# Altium PCB CabinTempSenseHardware2.PcbDoc
Units mil, origin at the board's own origin, x right, y up, seen from the top; angles counter-clockwise.
Board outline 1562 x 1352 mil, 2 copper layers (Top Layer, Bottom Layer); 25 components, 18 nets, 127 pads, 76 vias.
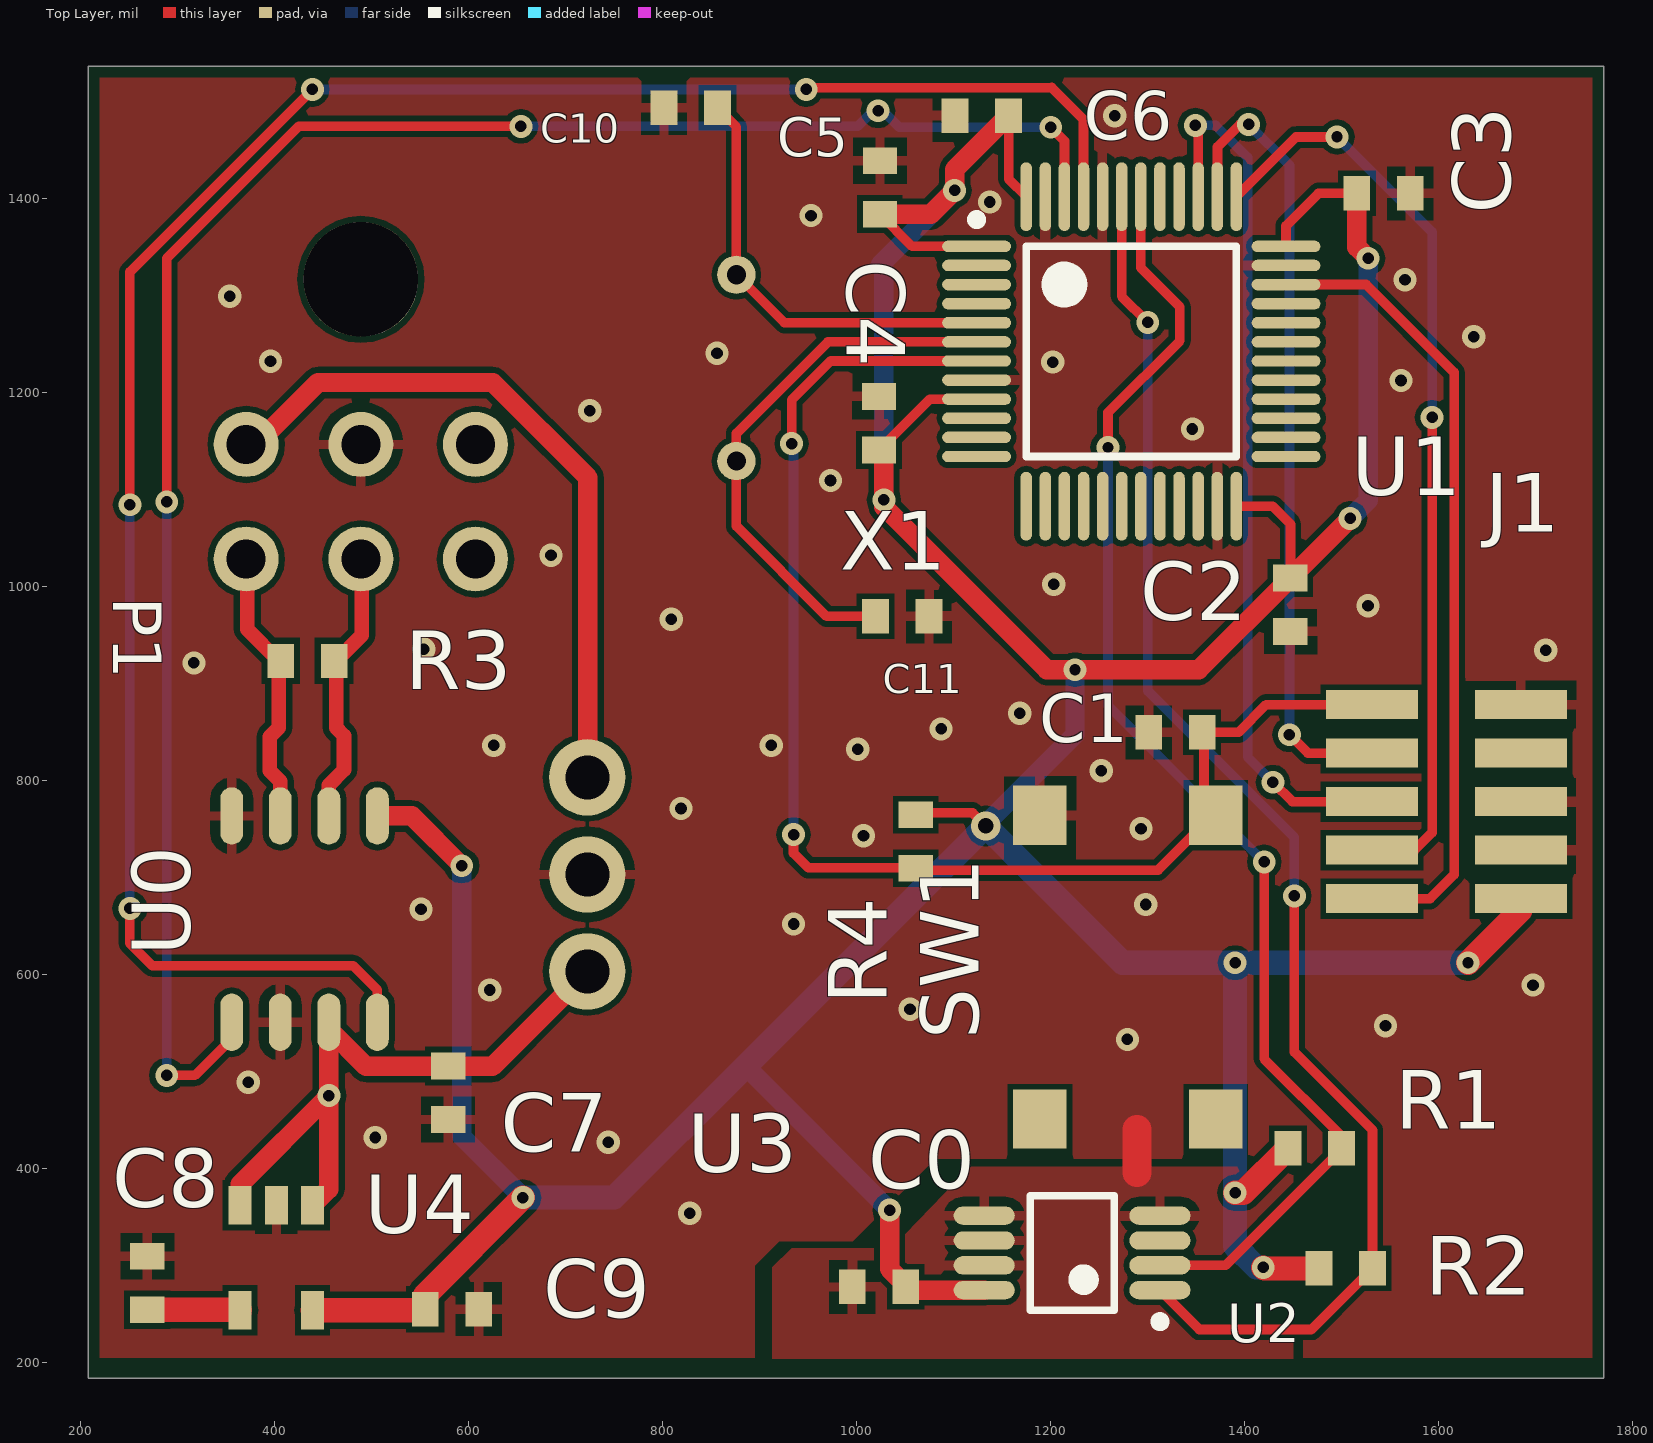
[diagram p0: Top Layer view]
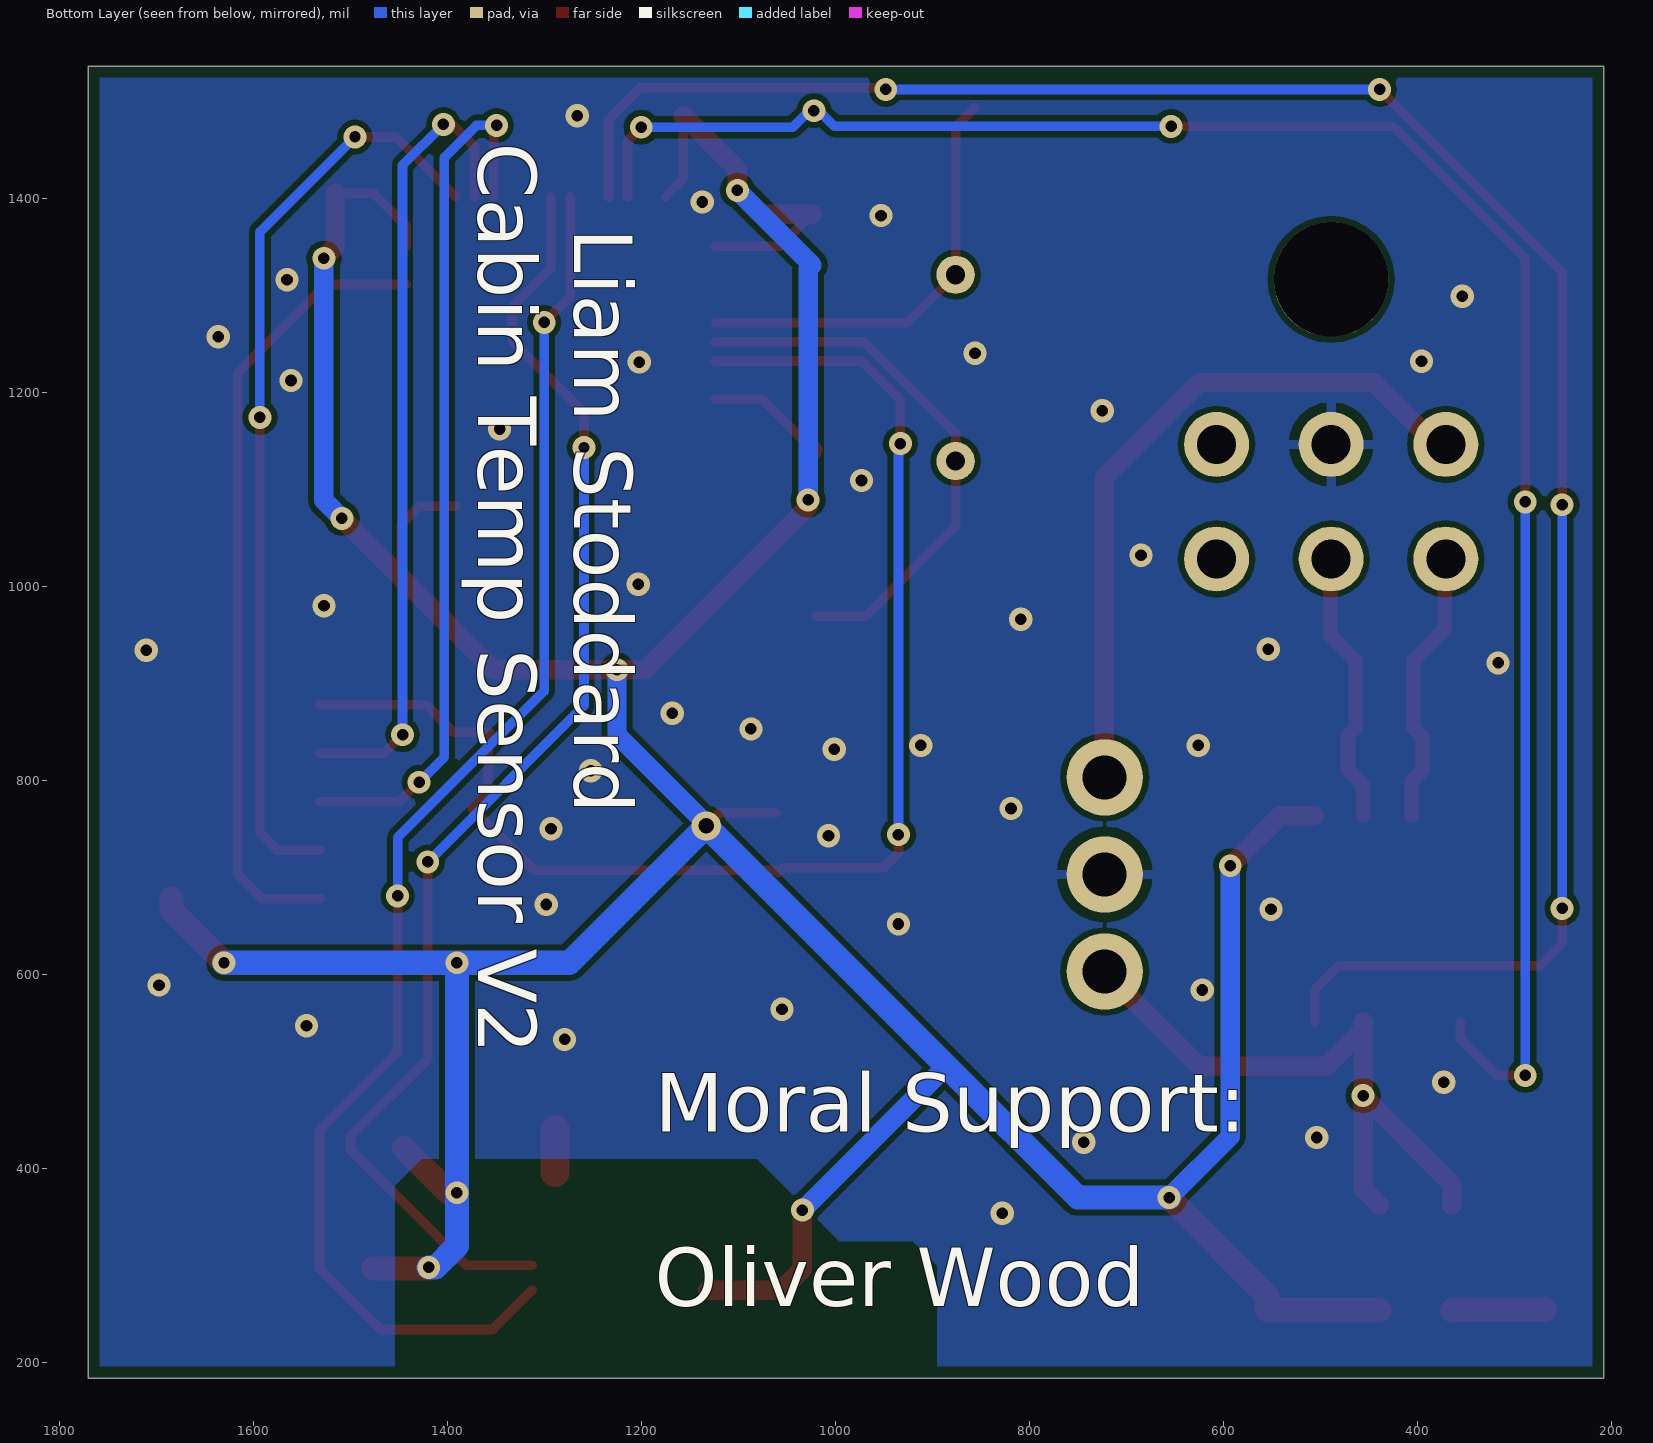
[diagram p1: Bottom Layer view, seen from below]
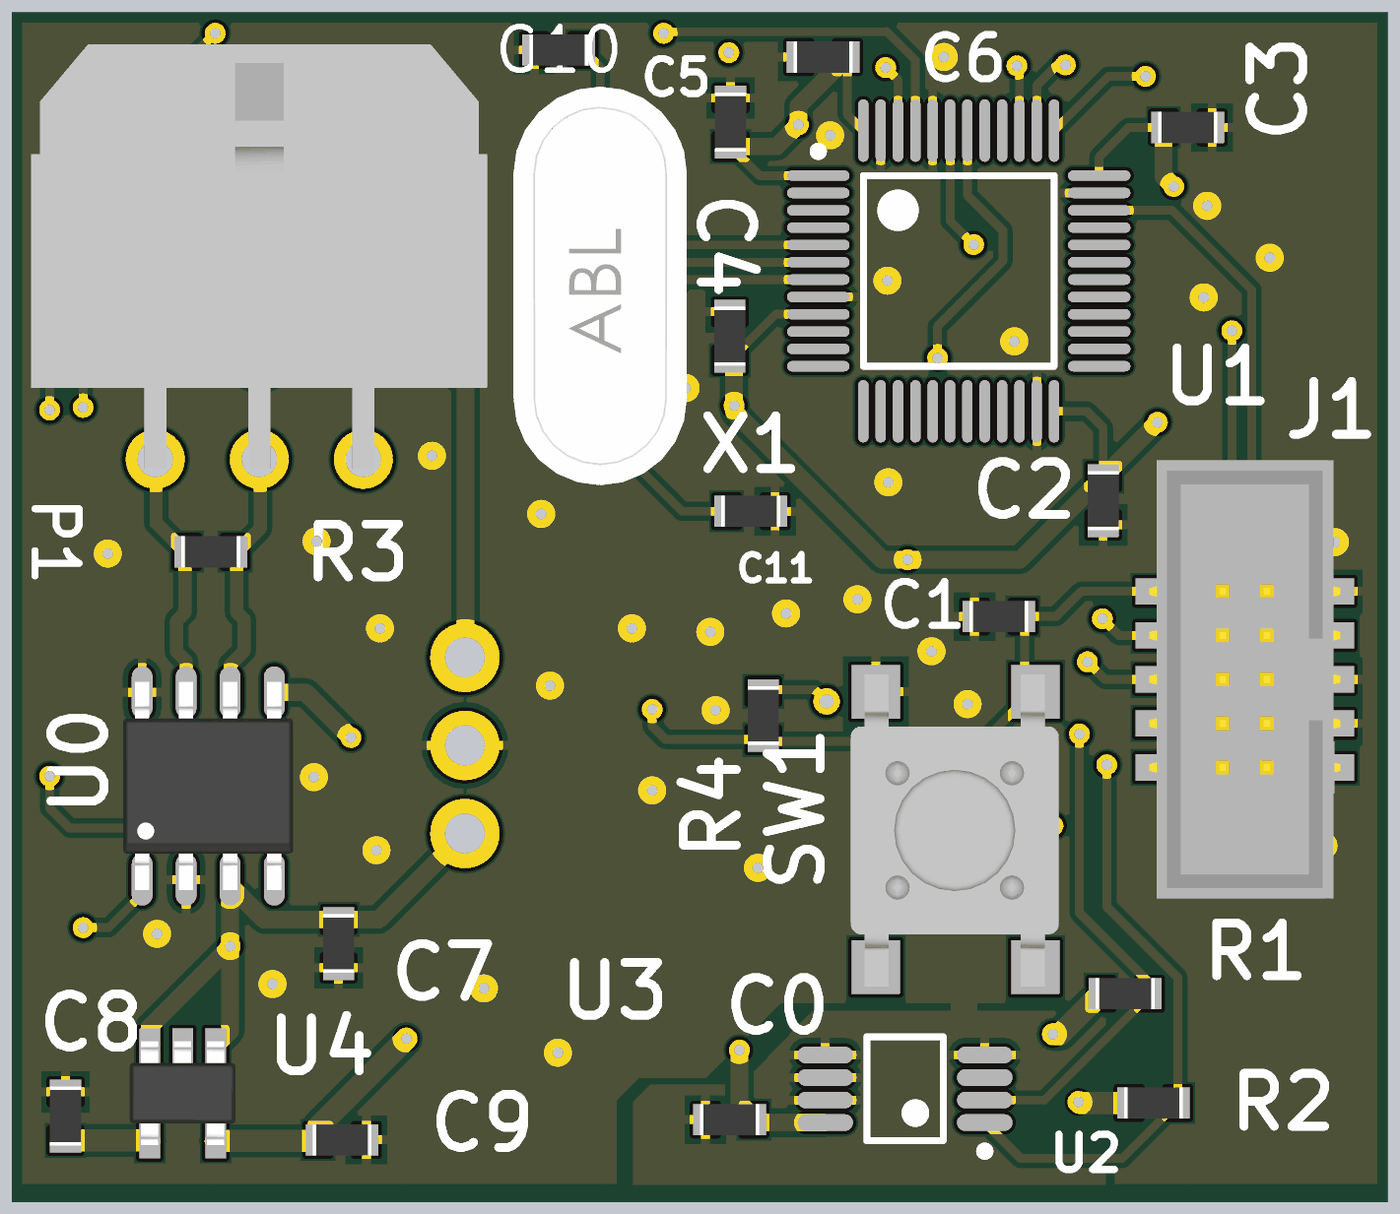
[diagram p2: 3D render of the assembled board from above, using the file's embedded part models]

## Layer stack, top to bottom
Top Solder: solder mask 0.4, Solder Resist, Dk 3.5
Top Layer: signal copper 1.4
Dielectric 1: dielectric 12.6, FR-4, Dk 4.8
Bottom Layer: signal copper 1.4
Bottom Solder: solder mask 0.4, Solder Resist, Dk 3.5

## Board outline
208,184 208,1536 489,1536 675,1536 863,1536 1770,1536 1770,858 1770,184

## Design rules (kind name [scope] priority, off if disabled: settings)
BoardOutlineClearance [All] p1: gap=11.81
Clearance [All] p1: gap=6
ComponentClearance [All] p1: gap=3.94 collisioncheckmode=3 verticalgap=10 showdistances=FALSE
DiffPairsRouting [All] p1: maxlimit=10 minlimit=10 mostfreqgap=10 toplayer_minwidth=15 toplayer_maxwidth=15 toplayer_prefwidth=15 bottomlayer_minwidth=15 bottomlayer_maxwidth=15 bottomlayer_prefwidth=15 maxuncoupledlength=500
FabricationTestPointUsage TestPointUsage [All] p1: valid=0 allowmultiple=FALSE
FabricationTestpoint Testpoint [All] p1: side=3 testpointundercomponent=TRUE minsize=40 maxsize=100 preferedsize=60 minholesize=0 maxholesize=40 preferedholesize=32 testpointgrid=1 allowsidetop=TRUE allowsidebottom=TRUE usegrid=TRUE gridtolerance=0.01
HoleSize [All] p1: absolutevalues=TRUE maxlimit=248.03 minlimit=11.81 maxpercent=80.000 minpercent=20.000
HoleToHoleClearance [All] p1: gap=17.72 allowstackedmicrovias=TRUE
MinimumAnnularRing [All] p1: minimumring=5.91
MinimumSolderMaskSliver [All] p1: minsoldermaskwidth=2.95
PlaneClearance [All] p1: clearance=19.68
PlaneConnect [All] p1: planeconnectstyle=Direct reliefexpansion=20 reliefentries=4 reliefconductorwidth=10 reliefairgap=10
PolygonConnect "GND Via" [isVia AND InNet('GND')] p1: connectstyle=Direct reliefconductorwidth=10 reliefentries=4 polygonreliefangle="90 Angle" airgapwidth=10 // GND Via Connection
PolygonConnect [All] p2: connectstyle=Relief reliefconductorwidth=10 reliefentries=4 polygonreliefangle="90 Angle" airgapwidth=9.84
RoutingVias [All] p1: holewidth=11.81 width=23.62 viastyle="Through Hole" minholewidth=11.81 minwidth=23.62 maxholewidth=248.03 maxwidth=259.84
SilkToSilkClearance [All] p1: silktosilkclearance=5.91
SilkToSolderMaskClearance SilkscreenOverComponentPads [IsPad] p1: minsilkscreentomaskgap=9.84 clearancetoexposedcopper=TRUE
SolderMaskExpansion [All] p1: expansion=3.94
UnpouredPolygon UnpouredPolygon_1 [All] p2:
Width [All] p1: maxlimit=78.74 minlimit=6 preferedwidth=9.84 minimp=50.000000 maximp=50.000000 favimp=50.000000
19 further rules are at their usual default settings.

## Classes and differential pairs
component class MCU: C1 C10 C11 J1 R4 SW1 U1 X1
component class Power&CAN: C2 C3 C4 C5 C6 C7 C8 C9 P1 R3 U0 U3 U4
component class Sensor: C0 R1 R2 U2
differential pair CAN: +CAN_P -CAN_N

## Components (designator, comment, footprint, x,y, rotation, side; value= is the part's Value field where it differs from the comment)
C0 "SCH_GENERIC_CAPACITOR_0603" PCB_GENERIC_SMD_0603 1023,278 r0 top
C1 "SCH_GENERIC_CAPACITOR_0603" PCB_GENERIC_SMD_0603 1328.47,849.47 r0 top
C2 "SCH_GENERIC_CAPACITOR_0603" PCB_GENERIC_SMD_0603 1447,981 r90 top
C3 "SCH_GENERIC_CAPACITOR_0603" PCB_GENERIC_SMD_0603 1543,1405 r180 top
C4 "SCH_GENERIC_CAPACITOR_0603" PCB_GENERIC_SMD_0603 1023,1168 r270 top
C5 "SCH_GENERIC_CAPACITOR_0603" PCB_GENERIC_SMD_0603 1024,1411 r270 top
C6 "SCH_GENERIC_CAPACITOR_0603" PCB_GENERIC_SMD_0603 1129,1485 r0 top
C7 "SCH_GENERIC_CAPACITOR_0603" PCB_GENERIC_SMD_0603 579,478 r90 top
C8 "SCH_GENERIC_CAPACITOR_0603" PCB_GENERIC_SMD_0603 269,282 r270 top
C9 "SCH_GENERIC_CAPACITOR_0603" PCB_GENERIC_SMD_0603 583,255 r180 top
C10 "SCH_GENERIC_CAPACITOR_0603" PCB_GENERIC_SMD_0603 829,1493 r180 top
C11 "SCH_GENERIC_CAPACITOR_0603" PCB_GENERIC_SMD_0603 1047,969 r0 top
J1 "SMT, shrouded" CONN-50mil-10POS-SMD 1607.77,778 r180 top
P1 "SCH_MLX_MICROFIT_3X2" PCB_MLX_MICROFIT_3X2 489,1245 r0 top
R1 "SCH_GENERIC_RESISTOR_0603" PCB_GENERIC_SMD_0603 1472,421 r180 top
R2 "SCH_GENERIC_RESISTOR_0603" PCB_GENERIC_SMD_0603 1504,297 r180 top
R3 "SCH_GENERIC_RESISTOR_0603" PCB_GENERIC_SMD_0603 434,923 r180 top
R4 "SCH_GENERIC_RESISTOR_0603" PCB_GENERIC_SMD_0603 1061,737 r90 top
SW1 "Tactile Switch" "C&K 4 pin Tactile Switch" 1279.45,607.5 r270 top
U0 "MCP2562" SOIC127P600X175-8N 431,657 r90 top
U1 "STM32F102C4T6A" STM-LQFP48_N 1283,1242 r0 top
U2 "I2C Temperature Sensor" "SENSOR TEMP I2C/SMBUS 8MSOP" 1222,313 r180 top
U3 "R78E-1.0 DC/DC" R78-1.0 811,703 r270 top
U4 "3.3V LDO" SOT95P280X145-5N 402,308 r270 top
X1 "8 MHz" CRYSTAL_8MHZ 876,1225 r90 top

## Footprints (in the part's own frame and the unit in brackets; to place one, negate y for a bottom-side part, rotate by r counter-clockwise, add the part's x,y. Pads: shape width x height; smd on the part's side, far side on the other; paste and mask are expansions set on the pad)
"C&K 4 pin Tactile Switch" [mm] "4 Pin Tactile Switch, SMT"
  rect 1.55x1.4 smd mask+0.1: 1(-3.975,2.3)
  rect 1.55x1.4 smd: 2(3.975,2.3) 3(-3.975,-2.3) 4(3.975,-2.3)
  body extent -4.47,-3.02 4.53,2.98, height 5
CONN-50mil-10POS-SMD [mm] "50mil 10POS 2ROW SMT HEADER"
  rect 2.4x0.76 smd: 1(-1.95,2.54) 2(1.95,2.54) 3(-1.95,1.27) 4(1.95,1.27) 5(-1.95,0) 6(1.95,0) 7(-1.95,-1.27) 8(1.95,-1.27) 9(-1.95,-2.54) 10(1.95,-2.54)
  body extent -2.75,-6.33 2.75,6.32, height 5.57
CRYSTAL_8MHZ [mm] "631-1100-ND"
  round 1 hole 0.5: 1(-2.44,0) 2(2.44,0)
  body extent -5.75,-2.5 5.75,2.5, height 3.55
PCB_GENERIC_SMD_0603 [mm]
  rect 0.7x0.9 smd: 1(-0.7,0) 2(0.7,0)
  body extent -0.85,-0.45 0.85,0.45, height 0.55
PCB_MLX_MICROFIT_3X2 [mm]
  round 1.7 hole 1.02: 1(-3,-2.51) 2(0,-2.51) 3(3,-2.51) 4(-3,-5.51) 5(0,-5.51) 6(3,-5.51)
  round 3 hole 3 unplated: ""(0,1.81)
  body extent -6.58,-5.78 6.57,6.46, height 8.83
R78-1.0 [mm]
  round 2 hole 1.15: 1(-2.54,-2.25) 2(0,-2.25) 3(2.54,-2.25)
  body extent -5.8,-4.25 5.8,4.25, height 10.4
"SENSOR TEMP I2C/SMBUS 8MSOP" [mm] "Temperature Sensor Digital, Local -40°C ~ 125°C 10 b 8-MSOP, Digikey; MCP9808T-E/MSCT-ND Mfg; MCP9808T-E/MS"
  oval 1.6x0.48 smd: 1(-2.3,0.975) 2(-2.3,0.325) 3(-2.3,-0.325) 4(-2.3,-0.975) 5(2.3,-0.975) 6(2.3,-0.325) 7(2.3,0.325) 8(2.3,0.975)
  silkscreen extent -2.43,-1.5 1.1,1.92, body extent -1.5,-1.5 1.5,1.5, height 1.1
SOIC127P600X175-8N [mm] "SOIC, 8-Leads, Body 4.90x3.90mm, Pitch 1.27mm, IPC Medium Density"
  oval 1.5x0.6 smd: 1(-2.7,1.905) 2(-2.7,0.635) 3(-2.7,-0.635) 4(-2.7,-1.905) 5(2.7,-1.905) 6(2.7,-0.635) 7(2.7,0.635) 8(2.7,1.905)
  body extent -3,-2.45 3,2.45, height 1.75
SOT95P280X145-5N [mm] "SOT23, 5-Leads, Body 2.90x2.80mm, Pitch 0.95mm, IPC Medium Density"
  rect 1x0.6 smd: 1(-1.375,0.95) 2(-1.375,0) 3(-1.375,-0.95) 4(1.375,-0.95) 5(1.375,0.95)
  body extent -1.5,-1.53 1.5,1.53, height 1.45
STM-LQFP48_N [mm] "QFP, 48-Leads, Body 7x7mm, Pitch 0.5mm, IPC Medium Density"
  oval 1.8x0.3 smd: 1(-4.05,2.75) 2(-4.05,2.25) 3(-4.05,1.75) 4(-4.05,1.25) 5(-4.05,0.75) 6(-4.05,0.25) 7(-4.05,-0.25) 8(-4.05,-0.75) 9(-4.05,-1.25) 10(-4.05,-1.75) 11(-4.05,-2.25) 12(-4.05,-2.75) 25(4.05,-2.75) 26(4.05,-2.25) 27(4.05,-1.75) 28(4.05,-1.25) 29(4.05,-0.75) 30(4.05,-0.25) 31(4.05,0.25) 32(4.05,0.75) 33(4.05,1.25) 34(4.05,1.75) 35(4.05,2.25) 36(4.05,2.75)
  oval 0.3x1.8 smd: 13(-2.75,-4.05) 14(-2.25,-4.05) 15(-1.75,-4.05) 16(-1.25,-4.05) 17(-0.75,-4.05) 18(-0.25,-4.05) 19(0.25,-4.05) 20(0.75,-4.05) 21(1.25,-4.05) 22(1.75,-4.05) 23(2.25,-4.05) 24(2.75,-4.05) 37(2.75,4.05) 38(2.25,4.05) 39(1.75,4.05) 40(1.25,4.05) 41(0.75,4.05) 42(0.25,4.05) 43(-0.25,4.05) 44(-0.75,4.05) 45(-1.25,4.05) 46(-1.75,4.05) 47(-2.25,4.05) 48(-2.75,4.05)
  silkscreen extent -4.17,-2.75 2.75,3.57, body extent -3.5,-3.5 3.5,3.5, height 1.6

## Part data
C0 C1 C2 C3 C4 C5 C6 C7 C8 C9 C10 C11: "Generic SMD capacitor 0603"
J1: library part "conn_0.050\"_cortexM", "ARM Cortex-M 10pin connector,shrouded,SMT"
R1 R2 R3 R4: "Generic SMD resistor 0603"
SW1: library part "C&K Tactile Switch"
U0: "1/1 Transceiver Full CAN 8-SOIC"
U1: "ARM Cortex-M3 32-bit MCU, 16 KB Flash, 4 KB Internal RAM, 37 I/Os, 48-pin LQFP, -40 to 85 degC, Tray"
U2: library part "Temperature Sensor Digital, Local -40°C ~ 125°C 10 b 8-MSOP, Digikey; MCP9808T-E/MSCT-ND Mfg; MCP9808T-E/MS"
U3: library part R78E-1.0
U4: library part 3V3LDO_TPS73633DBVR_SOT23-5, "Linear Voltage Regulator IC Positive Fixed 1 Output 3.3V 400mA SOT-23-5"
X1: library part XTAL_TH_8MHz, "8MHz ±30ppm 20pF Crystal"

## Via types
v1: diameter 24, hole 12, Top Layer to Bottom Layer, 41 vias
v2: diameter 23.62, hole 11.81, Top Layer to Bottom Layer, 34 vias
v3: diameter 30, hole 16, Top Layer to Bottom Layer, 1 vias

## Nets (pads, with @x,y where several pads share a name; then routed paths per layer and width w, separated by ;. In a path a pad name is that pad's centre, name@x,y a point inside that pad or via, vN(x,y) a via of type N, cw(c..) or ccw(c..) an arc to the next point about the centre after c; other vN are vias at no path point)
3V3: C0.2 C2.2 C3.2 C4.2 C5.2 C6.2 C9.2 J1.1 R1.2 R2.2 R4.2 U0.5 U1.1 U1.9 U1.24 U1.36 U1.48 U2.8 U4.5 | length 5261.1
  Top Layer w9.84: C6.2 1156.56,1419.62 U1.48
  Top Layer w10: C4.2 1075.35,1192.79 U1.9 ; C5.2 1057.17,1350.27 U1.1 ; R4.2@1061,766.53 1119.47,766.53 v3(1133,753) ; U1.24 1428.45,1082.55 1447,1064 C2.2 ; U1.36 1442.45,1371.45 1476,1405 C3.2
  Top Layer w20: U0.5 541.7,763.3 v2(593,712) ; C4.2 1028,1135.44 v2(1028,1089) 1028,1082 1196,914 v2(1225,914) 1352.44,914 C2.2 v2(1508.44,1070) ; C5.2 1076.44,1383.44 v2(1101,1408) 1101,1429.44 C6.2 ; v2(1034,357) 1034,296.53 1055.91,274.61 U2.8 ; C3.2 1515.44,1349.56 v2(1527,1338)
  Top Layer w25: U4.5 554.31,253.87 C9.2 555.44,269.44 v2(656,370) ; v2(1390,375) 1398.44,375 R1.2 ; v2(1419,298) 1420,297 R2.2 ; v2(1630,612) 1684,666 1684,677.46 J1.1
  Bottom Layer w20: v2(593,712) 593,433 v2(656,370) ; 884,504 887,504 v2(1034,357) ; v2(1028,1089) 1028,1327 1024,1331 v2(1101,1408) ; v3@1133,755 1225,847 v2(1225,914) ; v2(1508.44,1070) 1527,1088.56 v2(1527,1338)
  Bottom Layer w25: v2(656,370) 750,370 884,504 v3(1133,753) ; v3@1133,755 v3(1133,753) ; v2(1419,298) 1412,298 1390,320 v2(1390,375) v2(1390,612) ; v2(1630,612) v2(1390,612) ; v3(1133,753) 1274,612 v2(1390,612)
5V: C7.2 U0.3 U3.3 U4.1 U4.3 | length 669.4
  Top Layer w20: U4.3 364.6,383.6 v2(456,475) ; U4.1 456,378.73 v2(456,475) ; U0.3 U0.3@456,543.65 ; U3.3 624.59,505.17 579.39,505.17 C7.2 578.61,505.17 494.48,505.17 U0.3@456,543.65 ; v2(456,475) U0.3@456,543.65
12V: P1.1 U3.1 | length 703.4
  Top Layer w20: P1.1@371.89,1136.92 444.97,1210 625,1210 723,1112 723,832 U3.1@724,831
CAN_N: P1.5 R3.1 U0.6 | length 276.4
  Top Layer w15: U0.6 456,795 471.69,810.69 471.69,846 463.53,854.17 463.53,923 490,949.47 P1.5@490,1018.81
CAN_P: P1.4 R3.2 U0.7 | length 277.2
  Top Layer w15: P1.4@371.89,1018.81 371.89,955.58 404.47,923 404.47,854.17 395.31,845 395.31,809.69 406,799 U0.7
CAN_RX: U0.4 U1.45 | length 2155
  Top Layer w10: v2(251,668) 251,632 274,609 481,609 506,584 U0.4 ; v2(251,1084) 251,1324 v2(439,1512) ; v2(948,1512) 949.72,1513.72 1200.72,1513.72 1201,1514 1233.79,1481.21 U1.45
  Bottom Layer w10: v2(251,668) v2(251,1084) ; v2(439,1512) v2(948,1512)
CAN_TX: U0.1 U1.46 | length 1999.8
  Top Layer w10: v2(289,496) 318,496 356,534 U0.1 ; v2(289,1087) 289,1338 425,1474 v2(654,1474) ; v2(1200,1473) 1214.1,1458.9 U1.46
  Bottom Layer w10: v2(289,496) v2(289,1087) ; v2(654,1474) 1001,1474 1017,1490 v2(1022,1490) 1027,1490 1044,1473 v2(1200,1473)
GND: C0.1 C1.1 C2.1 C3.1 C4.1 C5.1 C6.1 C7.1 C8.1 C9.1 C10.2 C11.2 J1.3 J1.5 J1.9 P1.2 SW1.3 U0.2 U0.8 U1.8 U1.23 U1.35 U1.44 U1.47 U2.4 U2.5 U2.6 U2.7 U3.2 U4.2 | length 44.1
  Top Layer w30: 1289,396 1289,440.06
  other v1: 828,354 744,427 504,432 373,489 1279,533 1545,547 1055,564 622,584 1697,589 935,652 551,667 1298,672 1007,743 1293,750 819,771 1252,810 1001,832 626,836 912,836 1087,853 1168,869 317,921 1710,934 554,935 809,966 1527,980 1203,1002 685,1032 973,1109 1346,1162 725,1181 1561,1212 1202,1231 396,1232 856,1240 1636,1257 354,1299 1565,1316 953,1382 1137,1396 1266,1485
NetC8_2: C8.2 U4.4 | length 95.8
  Top Layer w25: C8.2 364.02,254.44 U4.4
NetC10_1: C10.1 U1.5 X1.2 | length 448.1
  Top Layer w9.84: C10.1 876,1473.56 X1.2 925.54,1271.53 U1.5
NetC11_1: C11.1 U1.6 X1.1 | length 564.1
  Top Layer w9.84: C11.1 969,969 876,1062 X1.1 876,1157.52 970.33,1251.84 U1.6
NetJ1_2: J1.2 U1.34 | length 823.4
  Top Layer w10: U1.34 1525.1,1310.9 1615.81,1220.19 1615.81,702.81 1591,678 J1.2
NetJ1_4: J1.4 U1.37 | length 956.3
  Top Layer w10: U1.37 1452.82,1463 v2(1495,1463) ; J1.4 1575,728 1593,746 v2(1593,1174)
  Bottom Layer w10: v2(1495,1463) 1593,1365 v2(1593,1174)
NetJ1_6: J1.6 U1.39 | length 907.5
  Top Layer w10: v2(1349,1475) 1351.9,1472.1 U1.39 ; v2(1429,798) 1449,778 J1.6
  Bottom Layer w10: v2(1349,1475) 1370,1475 1403,1442 1403,824 v2(1429,798)
NetJ1_8: J1.8 U1.38 | length 832.5
  Top Layer w10: U1.38 1371.81,1401.68 1371.81,1452.81 1395,1476 v2(1404,1476) ; v2(1446,847) 1465,828 J1.8
  Bottom Layer w10: v2(1404,1476) 1446,1434 v2(1446,847)
NetR1_1: R1.1 U1.42 U2.2 | length 1365.3
  Top Layer w9.84: U2.2 1380.2,300.2
  Top Layer w10: v2(1259,1143) 1259,1179 1333,1253 1333,1288 1292.84,1328.16 U1.42 ; 1380.2,300.2 1499.56,419.56 R1.1 1499.56,433.44 1420,513 v2(1420,716)
  Bottom Layer w10: v2(1259,1143) 1259,877 v2(1420,716)
NetR2_1: R2.1 U1.43 U2.1 | length 1473.4
  Top Layer w10: U1.43 1273.16,1298.84 v2(1300,1272) ; U2.1 1353.17,234 1468.56,234 R2.1 1531.56,439.44 1451,520 v2(1451,681)
  Bottom Layer w10: v2(1300,1272) 1300,892 1451,741 v2(1451,681)
NRST: C1.2 J1.10 R4.1 SW1.1 U1.7 | length 1421.7
  Top Layer w10: v2(933,1147) 933,1192 973.16,1232.16 U1.7 ; v2(935,744) 935,725 950,710 1053.53,710 1058.53,705 1061,707.47 1310.57,707.47 1374.1,771 1358,787.1 C1.2@1358,849.47 ; C1.2 1393.53,849.47 1422.06,878 J1.10
  Bottom Layer w10: v2(933,1147) 935,1145 v2(935,744)
pads on no net: J1.7 P1. P1.3 P1.6 SW1.2 SW1.4 U1.2 U1.3 U1.4 U1.10 U1.11 U1.12 U1.13 U1.14 U1.15 U1.16 U1.17 U1.18 U1.19 U1.20 U1.21 U1.22 U1.25 U1.26 U1.27 U1.28 U1.29 U1.30 U1.31 U1.32 U1.33 U1.40 U1.41 U2.3

## Polygon pours and split planes (outlines as drawn)
GND on Top Layer "GND top sensor" (solid, remove dead copper, pour order 18): 1450,212 1450,402 1187,402 1117,402 1036.61,318 933,318 913,298 913,204 1335,204 1442,204 1450,204
GND on Top Layer "GND top" (solid, remove dead copper, pour order 26): 215,1525 1765,1525 1765,206 1766,205 1460,205 1460,405 1456,410 1453,410 1449,410 1091,410 1081,410 1001,330 996,325 920,325 895,300 895,205 216,205 215,204
GND on Bottom Layer "GND bottom" (solid, remove dead copper, pour order 28): 208,1536 208,184 895,184 895,298 895,300 920,325 997,325 997,326 1081,410 1426,410 1454,382 1454,195 1769,195 1769,1536

## Silkscreen, mask and mechanical layers (free items; w line width, h text height)
Bottom Overlay:
  text "Cabin Temp Sensor V2" at 1368,1457 h60 r90
  text "Liam Stoddard" at 1269,1369 h60 r90
  text "Moral Support:  /  / Oliver Wood" at 1186,258 h60
Mechanical 1:
  lines w0.5: 208,184 208,1536 1770,1536 1770,184 208,184